# Altium PCB SlotMachin_V1.0.PcbDoc
Units mm, origin at the board's own origin, x right, y up, seen from the top; angles counter-clockwise.
Board outline 69.72 x 85.34 mm, 2 copper layers (Top Layer, Bottom Layer); 39 components, 46 nets, 163 pads, 11 vias.
Unrouted connection lines stored in the file: 11.
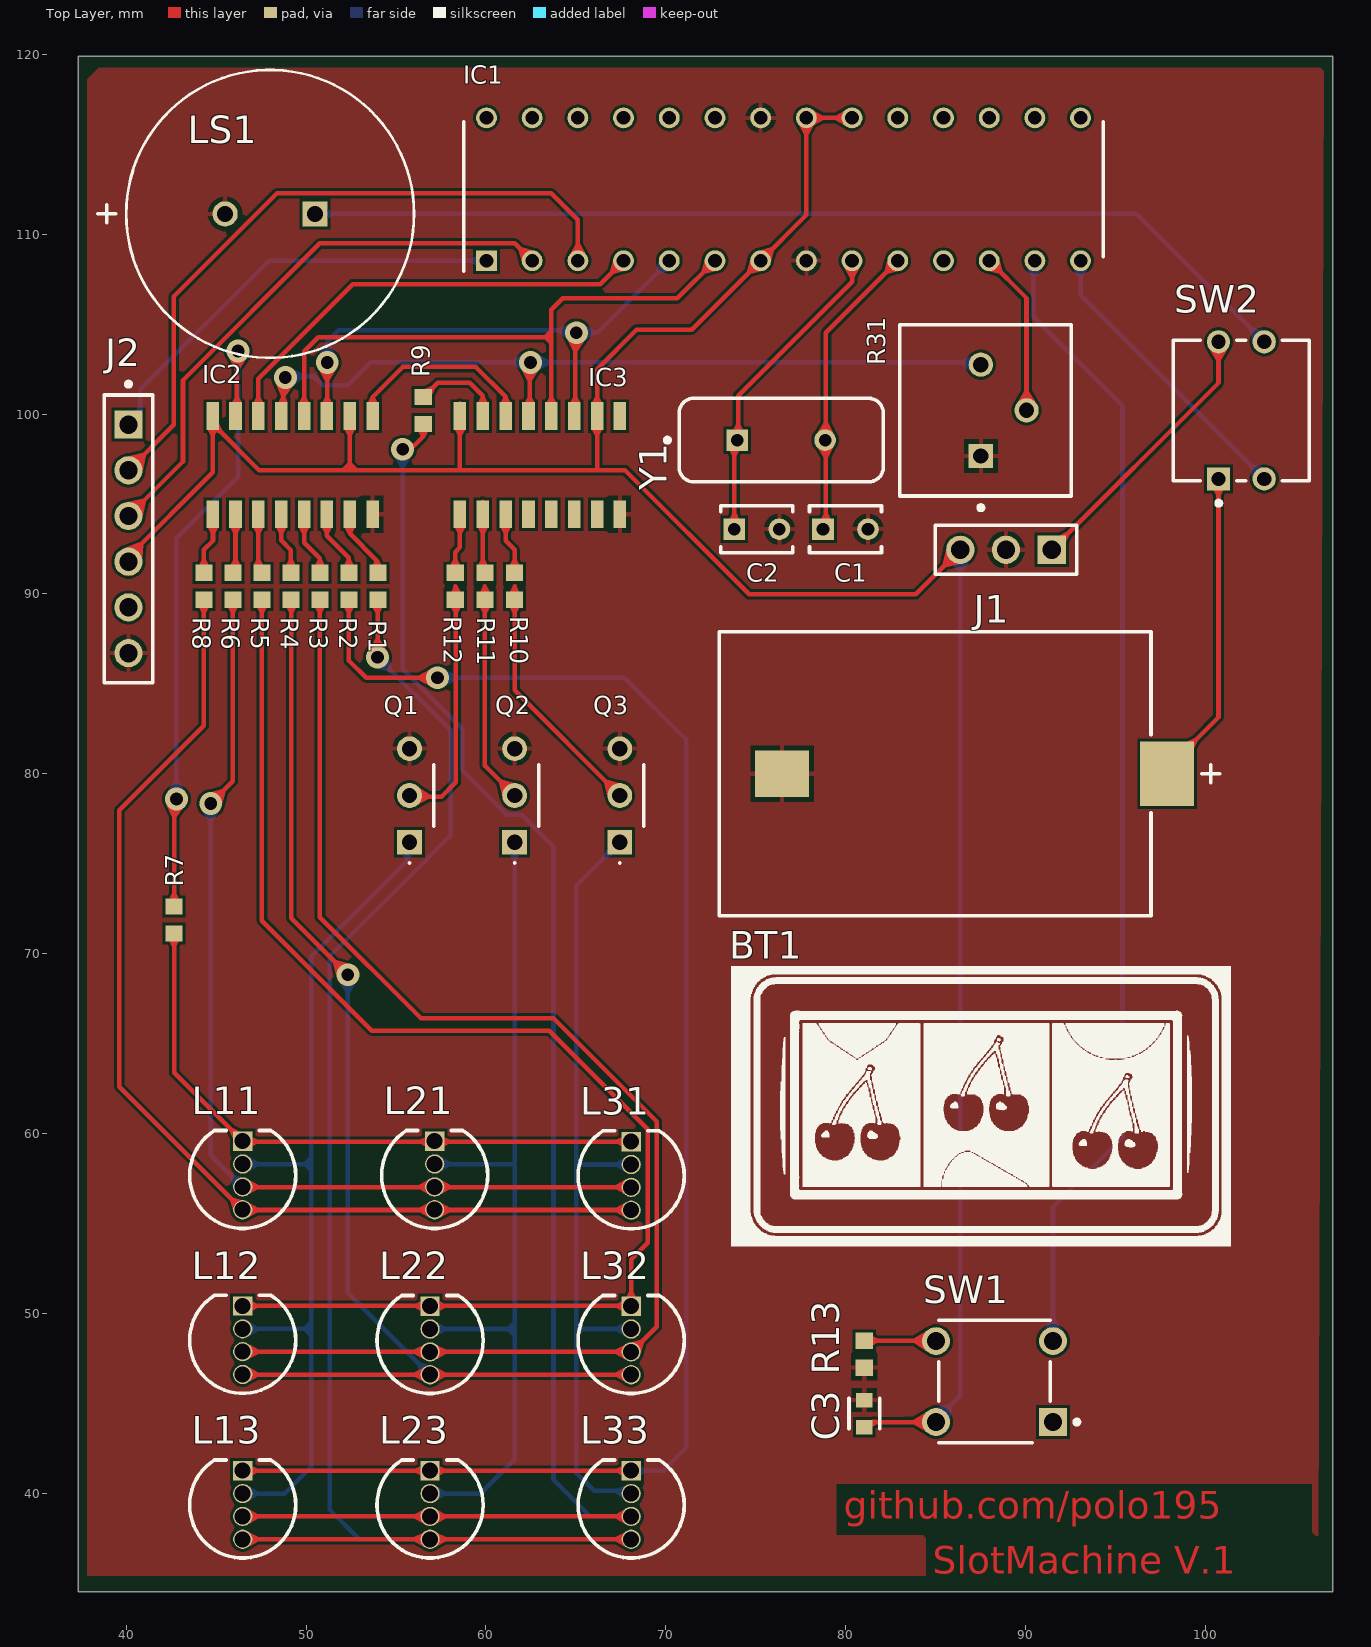
[diagram p0: Top Layer view]
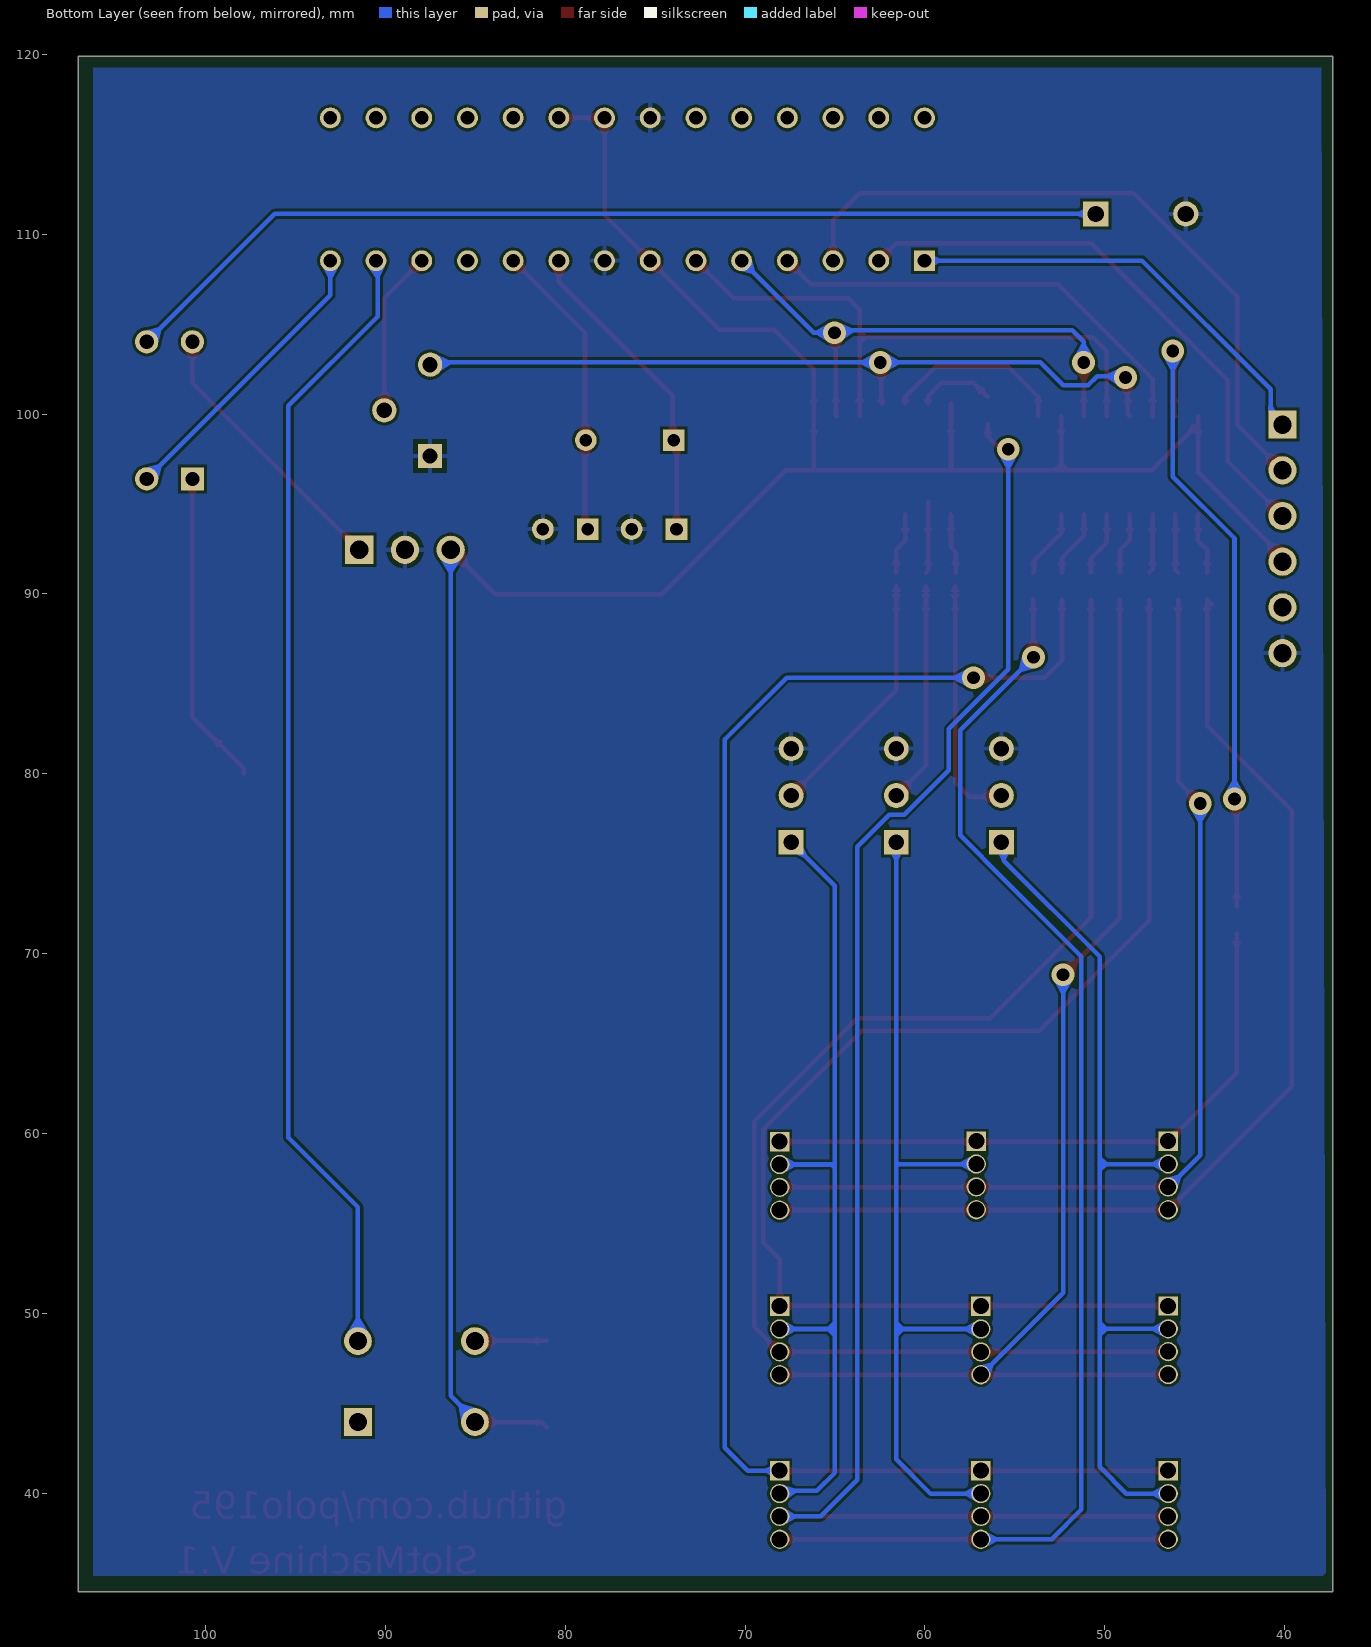
[diagram p1: Bottom Layer view, seen from below]
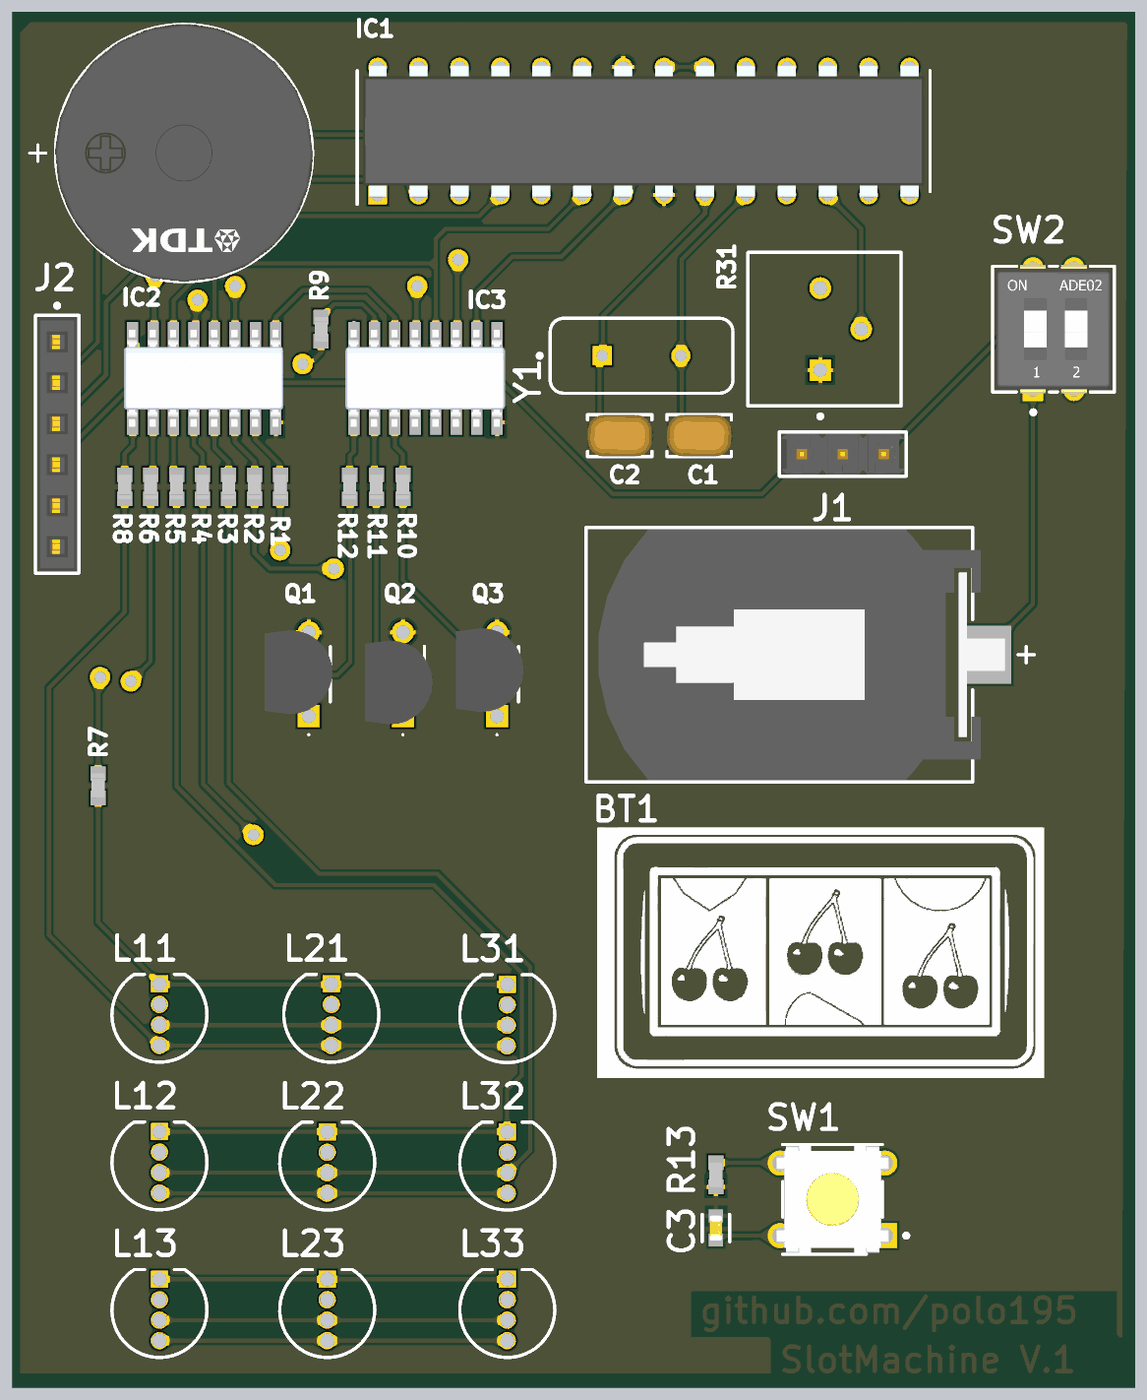
[diagram p2: 3D render of the assembled board from above, using the file's embedded part models]

## Layer stack, top to bottom
Top Solder: solder mask 0.0102, Solder Resist, Dk 3.5
Top Layer: signal copper 0.0356
Dielectric 1: dielectric 0.32, FR-4, Dk 4.8
Bottom Layer: signal copper 0.0356
Bottom Solder: solder mask 0.0102, Solder Resist, Dk 3.5

## Board outline
37.338,34.544 107.061,34.544 107.061,119.888 37.338,119.888

## Design rules (kind name [scope] priority, off if disabled: settings)
Clearance Clearance_1 [All] p1: gap=0.152 ignorepadtopadclearanceinfootprint=FALSE
PolygonConnect [All] p1: connectstyle=Relief reliefconductorwidth=0.254 reliefentries=4 polygonreliefangle="90 Angle" airgapwidth=0.254
RoutingVias [All] p1: holewidth=0.711 width=1.27 viastyle="Through Hole" minholewidth=0.711 minwidth=1.27 maxholewidth=0.711 maxwidth=1.27
SolderMaskExpansion [All] p1: expansion=0.102 istentingtop=FALSE
SupplyNets "Schematic Supply Nets_2" [InNet('VCC')] p1: voltage=0.000
SupplyNets "Schematic Supply Nets_1" [InNet('GND')] p2: voltage=0.000
SupplyNets "Schematic Supply Nets" [InNet('+5')] p3: voltage=0.000
Width [All] p1: maxlimit=0.254 minlimit=0.254 preferedwidth=0.254
30 further rules are at their usual default settings.

## Components (designator, comment, footprint, x,y, rotation, side; value= is the part's Value field where it differs from the comment)
BT1 "S8421-45R" FP-S8421-45R-MFG 84.963,80.01 r90 top
C1 "22pF" FP-K221K15X7RF5TL2-MFG 79.984,93.599 r0 top
C2 "22pF" FP-K221K15X7RF5TL2-MFG 75.057,93.599 r0 top
C3 "CC0603MRX7R7BB224" FP-CC0603-DA-MFG 81.026,44.45 r90 top value="220 nF"
IC1 "ATMEGA_328PU" DIP794W56P254L3486H508Q28N 76.537,112.49 r90 top
IC2 "74HCT595D,118" SOIC127P600X175-16N 49.257,97.155 r90 top
IC3 "74HCT595D,118" SOIC127P600X175-16N 63,97.155 r90 top
J1 "22-28-4035" FP-22-28-4035-MFG 88.9,92.456 r180 top
J2 "2212S-06SG-85" FP-2212S-06SG-85-MFG 40.132,93.064 r270 top
L11 "WP154A4SUREQBFZGC" KING-WP154A4SUREQBFZGC_V 46.482,57.683 r0 top
L12 "WP154A4SUREQBFZGC" KING-WP154A4SUREQBFZGC_V 46.482,48.527 r0 top
L13 "WP154A4SUREQBFZGC" KING-WP154A4SUREQBFZGC_V 46.482,39.37 r0 top
L21 "WP154A4SUREQBFZGC" KING-WP154A4SUREQBFZGC_V 57.15,57.683 r0 top
L22 "WP154A4SUREQBFZGC" KING-WP154A4SUREQBFZGC_V 56.896,48.514 r0 top
L23 "WP154A4SUREQBFZGC" KING-WP154A4SUREQBFZGC_V 56.896,39.37 r0 top
L31 "WP154A4SUREQBFZGC" KING-WP154A4SUREQBFZGC_V 68.072,57.658 r0 top
L32 "WP154A4SUREQBFZGC" KING-WP154A4SUREQBFZGC_V 68.072,48.514 r0 top
L33 "WP154A4SUREQBFZGC" KING-WP154A4SUREQBFZGC_V 68.072,39.37 r0 top
LS1 "SD1614T5-A1" FP-SD1614T5-A1-MFG 48.006,111.125 r180 top
Q1 "BC547BZL1G" BC547BZL1G 55.753,76.2 r90 top
Q2 "BC547BZL1G" BC547BZL1G 61.595,76.2 r90 top
Q3 "BC547BZL1G" BC547BZL1G 67.437,76.2 r90 top
R1 "560" RESC1608X55N 53.996,90.424 r270 top
R2 "560" RESC1608X55N 52.384,90.424 r270 top
R3 "560" RESC1608X55N 50.772,90.424 r270 top
R4 "560" RESC1608X55N 49.159,90.424 r270 top
R5 "560" RESC1608X55N 47.547,90.424 r270 top
R6 "560" RESC1608X55N 45.935,90.424 r270 top
R7 "560" RESC1608X55N 42.672,71.882 r90 top
R8 "560" RESC1608X55N 44.323,90.424 r270 top
R9 "560" RESC1608X55N 56.515,100.203 r90 top
R10 "1k" RESC1608X55N 61.595,90.424 r270 top
R11 "1k" RESC1608X55N 59.944,90.424 r270 top
R12 "1k" RESC1608X55N 58.293,90.424 r270 top
R13 "1k" RESC1608X55N 81.026,47.752 r270 top
R31 "M63P103KB30T607" VISH-M63P103KB30T607 87.763,100.203 r90 top
SW1 "B3W-1022" FP-B3W-1022-MFG 88.265,46.228 r0 top
SW2 "1825057-1" FP-1825057-1-MFG 101.981,100.203 r0 top
Y1 "FOXSLF/160-20" FOX-FOXSLF160-20 76.409,98.552 r0 top

## Footprints (in the part's own frame and the unit in brackets; to place one, negate y for a bottom-side part, rotate by r counter-clockwise, add the part's x,y. Pads: shape width x height; smd on the part's side, far side on the other; paste and mask are expansions set on the pad)
BC547BZL1G [mm]
  rect 1.381x1.381 hole 0.85: 1(0,0)
  round 1.381 hole 0.85: 2(2.6,0) 3(5.2,0)
  silkscreen extent -1.2,-1.34 4.32,0.05, body extent 0.13,-1.46 5.33,2.73, height 8.33
DIP794W56P254L3486H508Q28N [mm]
  rect 1.159x1.159 hole 0.759: 1(-3.969,16.51)
  round 1.159 hole 0.759: 2(-3.969,13.97) 3(-3.969,11.43) 4(-3.969,8.89) 5(-3.969,6.35) 6(-3.969,3.81) 7(-3.969,1.27) 8(-3.969,-1.27) 9(-3.969,-3.81) 10(-3.969,-6.35) 11(-3.969,-8.89) 12(-3.969,-11.43) 13(-3.969,-13.97) 14(-3.969,-16.51) 15(3.969,-16.51) 16(3.969,-13.97) 17(3.969,-11.43) 18(3.969,-8.89) 19(3.969,-6.35) 20(3.969,-3.81) 21(3.969,-1.27) 22(3.969,1.27) 23(3.969,3.81) 24(3.969,6.35) 25(3.969,8.89) 26(3.969,11.43) 27(3.969,13.97) 28(3.969,16.51)
  silkscreen extent -4.55,-17.78 3.75,17.78, body extent -4.11,-17.43 4.11,17.43, height 5.08
FOX-FOXSLF160-20 [mm] "THD, 2-Leads, Body 11.35x4.65mm"
  rect 1.2x1.2 hole 0.7: 1(-2.44,0)
  round 1.2 hole 0.7: 2(2.44,0)
  silkscreen extent -6.45,-2.32 5.68,2.32, body extent -5.67,-2.32 5.68,2.33, height 3.6
FP-22-28-4035-MFG [mm]
  rect 1.57x1.57 hole 1.02 paste-2539.97 mask+0: 1(-2.54,0)
  round 1.57 hole 1.02 paste-2539.97 mask+0: 2(0,0) 3(2.54,0)
  silkscreen extent -3.94,-1.37 3.94,1.37, body extent -4.04,-1.47 4.04,1.47, height 0.25
FP-2212S-06SG-85-MFG [mm]
  rect 1.57x1.57 hole 1.02 paste-2539.97 mask+0: 1(-6.35,0)
  round 1.57 hole 1.02 paste-2539.97 mask+0: 2(-3.81,0) 3(-1.27,0) 4(1.27,0) 5(3.81,0) 6(6.35,0)
  silkscreen extent -8.72,-1.35 8,1.35, body extent -8.1,-1.45 8.1,1.45, height 0.25
FP-1825057-1-MFG [mm]
  rect 1.29x1.29 hole 0.79 paste-2539.97 mask+0: 1(-1.27,-3.81)
  round 1.29 hole 0.79 paste-2539.97 mask+0: 2(1.27,-3.81) 3(1.27,3.81) 4(-1.27,3.81)
  silkscreen extent -3.78,-5.28 3.78,3.9, body extent -3.88,-4.55 3.88,4.55, height 0.25
FP-B3W-1022-MFG [mm]
  rect 1.55x1.55 hole 1 paste-2539.97 mask+0: 1(3.25,-2.25)
  round 1.55 hole 1 paste-2539.97 mask+0: 2(-3.25,-2.25) 3(3.25,2.25) 4(-3.25,2.25)
  silkscreen extent -3.1,-3.4 4.7,3.4, body extent -4.13,-3.5 4.13,3.5, height 0.25
FP-CC0603-DA-MFG [mm]
  rect 0.8x0.9 smd paste+0 mask+0: 1(-0.75,0) 2(0.75,0)
  silkscreen extent -0.85,-0.85 0.85,0.85, body extent -1.35,-0.75 1.35,0.75, height 0.25
FP-K221K15X7RF5TL2-MFG [mm]
  rect 1.2x1.2 hole 0.7 paste-2539.97 mask+0: 1(-1.25,0)
  round 1.2 hole 0.7 paste-2539.97 mask+0: 2(1.25,0)
  silkscreen extent -2,-1.3 2,1.3, body extent -2.1,-1.4 2.1,1.4, height 0.25
FP-S8421-45R-MFG [mm]
  rect 2.6x3 smd paste+0 mask+0: 1(0,8.5)
  rect 3.6x3 smd paste+0 mask+0: 2(0,-12.9)
  silkscreen extent -7.9,-15.83 7.9,12, body extent -8,-14.5 8,12.09, height 0.25
FP-SD1614T5-A1-MFG [mm]
  rect 1.4x1.4 hole 0.9 paste-2539.97 mask+0: 1(-2.5,0)
  round 1.4 hole 0.9 paste-2539.97 mask+0: 2(2.5,0)
  silkscreen extent -8,-8 9.57,8, body extent -8.1,-8.1 8.1,8.1, height 0.25
KING-WP154A4SUREQBFZGC_V [mm] "THD, 4-Leads, Dia 5.9mm, Pitch 1.27mm"
  rect 1.07x1.07 hole 0.889 paste-2539.97: 1(0,1.905)
  round 1.07 hole 0.889 paste-2539.97: 2(0,0.635) 3(0,-0.635) 4(0,-1.905)
  silkscreen extent -2.95,-2.95 2.95,2.5
RESC1608X55N [mm]
  rect 0.9x0.95 smd: 1(-0.75,0) 2(0.75,0)
  body extent -0.77,-0.4 0.77,0.4, height 0.46
SOIC127P600X175-16N [mm]
  rect 1.55x0.7 smd: 1(-2.725,4.445) 2(-2.725,3.175) 3(-2.725,1.905) 4(-2.725,0.635) 5(-2.725,-0.635) 6(-2.725,-1.905) 7(-2.725,-3.175) 8(-2.725,-4.445) 9(2.725,-4.445) 10(2.725,-3.175) 11(2.725,-1.905) 12(2.725,-0.635) 13(2.725,0.635) 14(2.725,1.905) 15(2.725,3.175) 16(2.725,4.445)
  body extent -3,-4.93 3,4.97, height 1.56
VISH-M63P103KB30T607 [mm] "THD, 3-Leads, Body 9.52x9.52mm, Pitch 2.54mm"
  rect 1.35x1.35 hole 0.85: 1(-2.54,0.26)
  round 1.35 hole 0.85: 2(0,-2.28) 3(2.54,0.26)
  silkscreen extent -5.53,-4.76 4.76,4.76, body extent -4.76,-4.76 4.76,4.76, height 10.91

## Part data
BT1: library part CMP-2000-07028-3, "BATTERY HOLDER COIN 20MM SMD", Case/Package=SMD/SMT, Max Operating Temperature=105°C, Min Operating Temperature=-40°C, Package Quantity=500, Contact Plating=Bronze, Material=Polyphenylene, Mount="Surface Mount", Number of Batteries=1, Number of Cells=1, Packaging="Tape and Reel", REACH SVHC="No SVHC", Termination=SMD/SMT
C1 C2: library part CMP-00030-39474895-1, "K221K15X7RF5TL2 Multilayer Ceramic Capacitor, 220 pF, 50 V, ± 10%, X7R, Radial Leaded", Capacitance=220pF, Case/Package=Dipped, Dielectric=X7R, Dielectric Material=Ceramic, Max Operating Temperature=125°C, Min Operating Temperature=-55°C, Tolerance=10%, Voltage Rating=50V, Depth=2.6mm, Diameter=500µm, Height=4mm, Height - Seated (Max)=5.588mm, Lead Diameter=500µm, Lead Length=30mm, Lead Pitch=2.5mm, Lead/Base Style=Straight, Length=4mm, Mount="Through Hole", NexarPartId=39474895, Number of Pins=2, Packaging="Cut Tape", Radiation Hardening=No, REACH SVHC=Unknown, RoHS=Compliant, Termination=Radial, Thickness=2.6mm, Voltage Rating (DC)=50V, Weight=160.004709mg, Width=2.4892mm
C3: library part CMP-03422-001274-1, "CAP CER 0.22UF 16V X7R 0603", Capacitance="220 nF", Manufacturer=YAGEO, Package=CC0603-DA, Temperature="-55°C to +125°C", Temperature Characteristic=X7R, Temperature Coefficient=15%, Temperature Range High=+125°C, Temperature Range Low=-55°C, Tolerance=0.2, Voltage="16 V", Automotive=No, Category=Cap, ComponentLink2Description=Datasheet, ComponentLink2URL=http://www.yageo.com/documents/recent/UPY-GPHC_X7R_6.3V-to-50V_18.pdf, Device Class L1="Passive Components", Device Class L2=Capacitors, Device Class L3="Ceramic Capacitors", Digikey Description="CAP CER 0.22UF 16V X7R 0603", Footprint Url=http://www.yageo.com/exep/pages/download/literatures/UPY-C_GEN_24.pdf, Height=0.9mm, Lead Free=Yes, Manufacturer Part Number=CC0603MRX7R7BB224, Material=Ceramic, Mouser Description="Multilayer Ceramic Capacitors MLCC - SMD/SMT 220nF 16V X7R 20%", Octopart=https://octopart.com/cc0603mrx7r7bb224-yageo-38999050, RoHS=TRUE, Voltage Rating="16 V"
IC1: "Integrated Circuit", Manufacturer_Name=Microchip, Manufacturer_Part_Number="ATMEGA 328PU", Datasheet Link=https://ww1.microchip.com/downloads/en/DeviceDoc/ATmega48A-PA-88A-PA-168A-PA-328-P-DS-DS40002061B.pdf, Height=5.08mm
IC2 IC3: "Integrated Circuit", Manufacturer_Name=Nexperia, Mouser Part Number=771-74HCT595D-T, Arrow Part Number=74HCT595D,118, Arrow Price/Stock=https://www.arrow.com/en/products/74hct595d118/nexperia?region=europe, Datasheet Link=https://assets.nexperia.com/documents/data-sheet/74HC_HCT595.pdf, Height=1.75mm, Manufacturer_Part_Number=74HCT595D,118, Mouser Price/Stock=https://www.mouser.co.uk/ProductDetail/Nexperia/74HCT595D118?qs=me8TqzrmIYVM2xcL0YiJEg%3D%3D
J1: library part CMP-00257-00247547-1, "22-28-4035 BOARD-BOARD Connector HEADER, 3WAY, 1ROW; Series: KK; Pitch Spacing: 2.54mm; No. of Rows: 1;", Color=Black, Contact Resistance=20mΩ, Current Rating=4A, Manufacturer Lifecycle Status=ACTIVE, Max Operating Temperature=75°C, Max Voltage Rating (DC)=250.25kV, Min Operating Temperature=0°C, Voltage Rating=250V, Connector Type="Male Pin", Contact Material=Brass, Contact Mating Length=7.493mm, Contact Plating=Gold, Country of Origin=US, Gender=Male, Glow Wire Compliant=Non-compliant, Housing Color=Black, Housing Material=Thermoplastic, Lead Free="Lead Free", Lifecycle Status=Production, Mount="Through Hole", NexarPartId=247547, Number of Circuits=3, Number of Contacts=3, Number of Positions=3, Number of Rows=1, Orientation=Vertical, Packaging=Bulk, Pitch=2.54mm, Plating=Tin, REACH SVHC=Unknown, RoHS=Compliant, Schedule B=8536694040, Termination="Through Hole"
J2: library part CMP-12414-000007-1, "Header, Rectangular, 6 Positions, Receptacle, 2.54mm pitch, Vertical, Through-Hole", Flammability Rating="UL94 V-0", Insulation Resistance=1GR, Contact Material=Bronze, Contact Plating=Gold, Gender=Receptacle, Height=0.35inch, Length=0.63inch, Mount="Through Hole", Number of Contacts=6, Number of Rows=1, REACH SVHC="No SVHC", RoHS Compliant=Yes, Termination="Through Hole", Weight=0.11lb, Width=0.12inch
L11 L12 L13 L21 L22 L23 L31 L32 L33: library part CMP-2000-07415-1, "Full Color LED Lamp, Dominant Wavelength RGB 630 / 525 / 465 nm, -40 to 85 degC, 4-Pin THD, RoHS", Color=Red,Green,Blue(RGB), Current - Test=20mA, Manufacturer=Kingbright, Millicandela Rating=1300mcdRed,1700mcdGreen,900mcdBlue, Package / Case=Radial-4Leads, Package Description="4-Pin Through Hole LED, Dia 5.9 mm, Pitch 1.27 mm", Standard Package=500, Voltage - Forward (Vf) (Typ)=1.9VRed,3.3VGreen,3.3VBlue, 3D Model="WP154A4SUREQBFZGW.sldprt /  / WP154A4SUREQBFZGW.pro /  / WP154A4SUREQBFZGW.igs /  / WP154A4SUREQBFZGW.stp", Category=Optoelectronics, Datasheet URL=https://www.kingbrightusa.com/images/catalog/spec/WP154A4SUREQBFZGC.pdf, Datasheet Version="Rev. 5A, 08/2014", Family=LEDIndication-Discrete, Height=8.60mm, Lens Style/Size=RoundwithDomedTop,5mm,T-13/4, Lens Type=Clear, Manufacturer URL=http://www.kingbright.com/, Mounting Technology=ThroughHole, Mounting Type=ThroughHole, Online Catalog=5mm,T-13/4(RGB)RoundwithDomedTopLEDLamp, Other Names="754-1615 / WP154A4SUREQBFZGC-ND", Package Reference=WP154A4SUREQBFZGC, Packaging=Bulk, Viewing Angle=50°, Wavelength - Dominant=630nm,525nm,465nm, Wavelength - Peak=645nm,515nm,460nm
LS1: library part CMP-08413-000005-1, "BUZZER MAGNETIC 5V 80DB 2048HZ 1", Frequency=2.048kHz, Max Operating Temperature=85°C, Min Operating Temperature=-40°C, Operating Supply Current=80mA, Voltage Rating=5V, Mount=Panel, Sensing Method=Magnetic, Termination="PC Pins"
Q1 Q2 Q3: "Transistor BJT NPN", Manufacturer_Name=onsemi, Mouser Part Number=863-BC547BZL1G, Arrow Part Number=BC547BZL1G, Arrow Price/Stock=https://www.arrow.com/en/products/bc547bzl1g/on-semiconductor?region=nac, Datasheet Link=https://www.onsemi.com/download/data-sheet/pdf/BC546-D.PDF, Height=9.33mm, Manufacturer_Part_Number=BC547BZL1G, Mouser Price/Stock=https://www.mouser.com/Search/Refine.aspx?Keyword=863-BC547BZL1G
R1 R2 R3 R4 R5 R6 R7 R8 R9 R10 R11 R12 R13: library part CPF0603B12RE, "Resistor", Manufacturer_Name="TE Connectivity", Datasheet Link=http://www.farnell.com/datasheets/1786775.pdf, Height=0.55mm, Manufacturer_Part_Number=CPF0603B12RE
R31: library part CMP-1666-00012-6, "Single-Turn Cermet Trimmer, 10 KOhm, -55 to 125 degC, 3-Pin THD, RoHS, Bulk", Manufacturer="Vishay Semiconductor", ComponentLink1Description="Manufacturer URL", ComponentLink1URL=http://www.vishay.com/, ComponentLink2Description=Datasheet, ComponentLink2URL=http://120.52.73.14/www.mouser.com/ds/2/427/63-239923.pdf, DatasheetVersion=09/2015, Mounting Technology="Through Hole", PackageDescription="3-Pin Through Hole Device, Body 9.52 x 9.52 mm, Pitch 2.54 mm", PackageReference=M63P103KB30T607
SW1: library part CMP-08834-000055-1, "SWITCH TACTILE SPST-NO 0.05A 24V", Max Operating Temperature=70°C, Min Operating Temperature=-25°C, Operating Force=230gf, Ratings=IP67, Actuator Type=Standard, Illumination Type=Non-Illuminated, Mechanical Life=1000000Cycles, Mount="Through Hole", Packaging=Bulk, RoHS Compliant=Yes, Switch Function=Off-Mom, Switch Travel=0.25mm, Termination="PC Pin", Throw Configuration=SPST
SW2: library part CMP-03400-000012-1, "SWITCH SLIDE DIP SPST 100MA 24V", Contact Current Rating=100mA, Contact Resistance=50mΩ, Manufacturer="TE Connectivity", Temperature="-30°C to +85°C", Temperature Range High=+85°C, Temperature Range Low=-30°C, Voltage Rating Dc=24V, Automotive=No, Category=Switch, ComponentLink2Description=Datasheet, ComponentLink2URL=https://www.te.com/commerce/DocumentDelivery/DDEController?Action=srchrtrv&DocNm=1825057&DocType=Customer+Drawing&DocLang=English, Device Class L1=Electromechanical, Device Class L2=Switches, Device Class L3="DIP Switches", Digikey Description="SWITCH SLIDE DIP SPST 100MA 24V", Electromechanical Life=1000Cycles, Height=6.15mm, Lead Free=Yes, Manufacturer Part Number=1825057-1, Mount="Through Hole", Number of Circuits=2, Octopart=https://octopart.com/1825057-1-te+connectivity-46507313, Package=1825057-1, RoHS=TRUE, Standoff Height=1.3mm, Throw Configuration=SPST
Y1: library part CMP-1749-00003-1, "Resistance Weld Thru-Hole Crystal, 16 MHz, -20 to 70 degC, 2-Pin THD, RoHS, Bulk", Case\Package=Axial, Max Operating Temperature="155 degC", Min Operating Temperature="-55 degC", Package Quantity=200, Power Rating="250 mW", Resistance="221 kohm", Tolerance=1%, Voltage Rating="250 V", ComponentLink1Description="Manufacturer URL", ComponentLink1URL=http://www.foxonline.com/, ComponentLink2Description=Datasheet, ComponentLink2URL=http://www.foxonline.com/pdfs/hc49slf.pdf, DatasheetVersion=Mar-15, Length="0.248 inch", Mount="Through Hole", PackageDescription="2-Pin Through Hole Device, Body 11.35 x 4.65 mm", PackageReference=FOXSLF160-20, Packaging=Bulk, RoHSCompliant=true

## Via types
v1: diameter 1.27, hole 0.711, Top Layer to Bottom Layer, 11 vias

## Nets (pads, with @x,y where several pads share a name; then routed paths per layer and width w, separated by ;. In a path a pad name is that pad's centre, name@x,y a point inside that pad or via, vN(x,y) a via of type N, cw(c..) or ccw(c..) an arc to the next point about the centre after c; other vN are vias at no path point)
+5: C3.1 IC1.7 IC1.20 IC1.21 IC2.10 IC2.16 IC3.10 IC3.16 J1.3 J2.4 SW1.2 | length 145
  Top Layer w0.254: J2.4 40.132,92.075 44.812,96.755 IC2.16@44.812,99.441 ; IC2.16 44.812,99.455 47.388,96.879 52.432,96.879 ; IC2.10 52.432,96.879 ; IC3.16@58.555,100.584 IC3.16 58.555,96.909 58.525,96.879 ; IC1.20 IC1.21 77.807,111.061 IC1.7 71.438,104.692 68.37,104.692 66.175,102.497 IC3.10 66.175,96.887 66.167,96.879 ; C3.1 81.299,43.973 83.271,43.973 83.276,43.978 SW1.2 ; J1.3 83.887,89.983 74.626,89.983 67.729,96.879 66.167,96.879 ; 52.432,96.879 58.525,96.879 ; 58.525,96.879 66.167,96.879
  Bottom Layer w0.254: SW1.2@85.015,44.105 86.36,45.45 J1.3
GND: BT1.1 C1.2 C2.2 C3.2 IC1.8 IC1.22 IC2.8 IC3.8 J1.2 J2.6 LS1.2 Q1.3 Q2.3 Q3.3 R13.2 R31.1
NetC1_1: C1.1 IC1.10 Y1.2 | length 16.7
  Top Layer w0.254: C1.1 78.894,93.759 78.894,98.507 Y1.2 78.894,98.597 78.894,104.528 IC1.10
NetC2_1: C2.1 IC1.9 Y1.1 | length 17.6
  Top Layer w0.254: C2.1 73.807,98.39 74.014,98.597 74.014,101.021 80.347,107.354 IC1.9
NetIC1_1: IC1.1 J2.1 | length 24.4
  Bottom Layer w0.254: J2.1 40.79,100.072 40.79,101.369 47.942,108.521 IC1.1
NetIC1_2: IC1.2 J2.3 | length 31.8
  Top Layer w0.254: J2.3 43.162,97.364 43.162,101.876 50.768,109.482 61.607,109.482 IC1.2
NetIC1_3: IC1.3 J2.2 | length 38.4
  Top Layer w0.254: J2.2 42.654,99.396 42.654,106.535 48.387,112.268 63.627,112.268 65.107,110.788 IC1.3
NetIC1_4: IC1.4 IC2.14 | length 25.1
  Top Layer w0.254: IC2.14 47.352,101.962 52.606,107.216 66.343,107.216 IC1.4
NetIC1_5: IC1.5 IC2.11 IC3.11 | length 29.8
  Top Layer w0.254: IC2.11 51.171,99.89 51.171,102.86 v1(51.181,102.87) ; IC3.11 64.965,99.939 64.965,104.462 v1(65.024,104.521)
  Bottom Layer w0.254: v1(51.181,102.87) 51.181,104.013 51.816,104.648 64.897,104.648 v1(65.024,104.521) 66.187,104.521 IC1.5
NetIC1_6: IC1.6 IC2.12 IC3.12 | length 33.8
  Top Layer w0.254: IC2.12 49.892,103.486 50.681,104.275 63.635,104.275 ; IC3.12 63.635,104.275 ; IC1.6 70.632,106.426 64.262,106.426 63.635,105.799 63.635,104.275
NetIC1_12: IC1.12 R31.2 | length 9.2
  Top Layer w0.254: IC1.12 90.043,106.445 R31.2
NetIC1_13: IC1.13 SW1.3 | length 63.7
  Bottom Layer w0.254: IC1.13 90.424,108.438 90.424,105.41 95.377,100.457 95.377,59.791 91.515,55.929 SW1.3
NetIC1_14: IC1.14 SW2.2 | length 16.4
  Bottom Layer w0.254: IC1.14 93.047,106.597 SW2.2
NetIC2_1: IC2.1 R8.1 | length 3.5
  Top Layer w0.254: R8.1 44.323,92.456 44.831,92.964 44.831,94.411 IC2.1
NetIC2_2: IC2.2 R6.1 | length 3.3
  Top Layer w0.254: R6.1 46.082,91.321 IC2.2
NetIC2_3: IC2.3 R5.1 | length 3.3
  Top Layer w0.254: IC2.3 47.352,91.369 R5.1
NetIC2_4: IC2.4 R4.1 | length 3.5
  Top Layer w0.254: IC2.4 48.622,92.983 49.159,92.446 R4.1
NetIC2_5: IC2.5 R3.1 | length 3.6
  Top Layer w0.254: IC2.5 49.892,92.856 50.772,91.976 R3.1
NetIC2_6: IC2.6 R2.1 | length 3.8
  Top Layer w0.254: IC2.6 51.162,93.237 52.384,92.015 R2.1
NetIC2_7: IC2.7 R1.1 | length 3.9
  Top Layer w0.254: IC2.7 52.432,93.364 53.94,91.856 53.94,91.23 R1.1
NetIC2_9: IC2.9 IC3.14 | length 10.2
  Top Layer w0.254: IC2.9 53.702,100.946 55.372,102.616 59.436,102.616 61.095,100.957 IC3.14@61.095,100.584
NetIC2_13: IC2.13 IC3.13 R31.3 | length 44.1
  Top Layer w0.254: IC2.13 48.737,99.995 48.737,101.91 v1(48.851,102.025) ; IC3.13@62.365,100.584 62.425,100.643 62.425,102.811 v1(62.484,102.87)
  Bottom Layer w0.254: v1(48.851,102.025) 48.935,102.108 50.429,102.108 50.937,101.6 52.324,101.6 53.594,102.87 v1(62.484,102.87) 87.376,102.87 R31.3
NetIC2_15: IC2.15 R7.2 | length 36
  Top Layer w0.254: R7.2 42.672,78.486 v1(42.799,78.613) ; IC2.15 46.155,99.953 46.155,103.432 v1(46.228,103.505)
  Bottom Layer w0.254: v1(42.799,78.613) 42.799,93.091 46.228,96.52 v1(46.228,103.505)
NetIC3_1: IC3.1 R12.1 | length 3.4
  Top Layer w0.254: R12.1 58.293,92.329 58.555,92.591 IC3.1
NetIC3_2: IC3.2 R11.1 | length 4
  Top Layer w0.254: IC3.2@59.825,95.134 59.825,91.293 R11.1
NetIC3_3: IC3.3 R10.1 | length 3.5
  Top Layer w0.254: IC3.3 61.095,92.956 61.595,92.456 R10.1
NetIC3_15: IC3.15 R9.2 | length 4.4
  Top Layer w0.254: R9.2 56.54,100.953 57.327,101.74 59.094,101.74 59.825,101.009 IC3.15@59.825,100.584
NetJ1_1: J1.1 SW2.4 | length 15.4
  Top Layer w0.254: J1.1 100.711,101.727 SW2.4
NetL11_1: L11.1 L21.1 L31.1 R7.1 | length 34.7
  Top Layer w0.254: R7.1 42.672,63.398 L11.1 46.507,59.563 L31.1
NetL11_2: L11.2 L12.2 L13.2 Q1.1 | length 49
  Bottom Layer w0.254: L13.2 48.807,40.005 50.292,41.49 50.292,49.162 ; L12.2 50.292,49.162 ; L11.2 50.292,58.318 ; Q1.1 55.626,76.073 55.626,75.184 50.292,69.85 50.292,58.318 ; 50.292,49.162 50.292,58.318
NetL11_3: L11.3 L21.3 L31.3 R6.2 | length 55.5
  Top Layer w0.254: v1(44.704,78.359) 45.935,79.59 R6.2 ; L11.3 46.495,57.036 68.059,57.036 L31.3
  Bottom Layer w0.254: v1(44.704,78.359) 44.704,58.801 46.457,57.048 L11.3
NetL11_4: L11.4 L21.4 L31.4 R8.2 | length 60.7
  Top Layer w0.254: R8.2@44.069,89.42 R8.2 44.323,82.677 39.624,77.978 39.624,62.611 46.457,55.778 L11.4 46.495,55.766 68.059,55.766 L31.4
NetL12_1: L12.1 L22.1 L32.1 R5.2 | length 75.9
  Top Layer w0.254: L12.1 68.059,50.432 L32.1 68.072,53.022 68.988,53.938 68.988,60.256 63.517,65.727 53.653,65.727 47.547,71.833 R5.2
NetL12_3: L12.3 L22.3 L32.3 R3.2 | length 76.1
  Top Layer w0.254: L12.3 46.488,47.885 68.066,47.885 L32.3 68.097,47.879 69.496,49.278 69.496,60.679 63.754,66.421 56.388,66.421 50.772,72.037 R3.2
NetL12_4: L12.4 L22.4 L32.4 R4.2 | length 67.9
  Top Layer w0.254: L12.4 46.488,46.615 68.066,46.615 L32.4 ; R4.2@49.184,89.674 49.184,71.974 v1(52.324,68.834)
  Bottom Layer w0.254: v1(52.324,68.834) 52.324,51.156 56.871,46.609 L22.4
NetL13_1: L13.1 L23.1 L33.1 R2.2 | length 88.5
  Top Layer w0.254: L13.1 L23.1 L33.1 ; R2.2 52.384,86.3 53.34,85.344 v1(57.31,85.344)
  Bottom Layer w0.254: v1(57.31,85.344) 67.691,85.344 71.12,81.915 71.12,42.545 69.85,41.275 L33.1
NetL13_3: L13.3 L23.3 L33.3 R9.1 | length 90.1
  Top Layer w0.254: L13.3 L23.3 L33.3 ; v1(55.372,98.044) 55.566,98.238 56,98.238 56.515,98.753 R9.1
  Bottom Layer w0.254: v1(55.372,98.044) 55.372,85.808 58.674,82.506 58.674,80.206 61.151,77.728 61.986,77.728 63.754,75.961 63.754,40.767 65.786,38.735 L33.3
NetL13_4: L13.4 L23.4 L33.4 R1.2 | length 82.9
  Top Layer w0.254: L13.4 L23.4 L33.4 ; v1(53.975,86.487) 53.975,89.653 R1.2
  Bottom Layer w0.254: v1(53.975,86.487) 58.039,82.423 58.039,76.581 56.825,75.367 56.825,75.352 56.601,75.128 56.586,75.128 51.308,69.85 51.308,39.116 52.959,37.465 L23.4
NetL21_2: L21.2 L22.2 L23.2 Q2.1 | length 49
  Bottom Layer w0.254: L23.2 59.69,40.005 61.595,41.91 61.595,49.149 ; L22.2 61.595,49.149 ; L21.2 61.493,58.318 61.595,58.42 ; Q2.1 61.595,58.42 ; 61.595,49.149 61.595,58.318 61.595,58.42
NetL31_2: L31.2 L32.2 L33.2 Q3.1 | length 45.7
  Bottom Layer w0.254: Q3.1 65.022,73.785 65.022,58.122 ; L33.2 67.916,40.161 66.011,40.161 65.022,41.15 65.022,49.149 ; L32.2 65.022,49.149 ; L31.2 65.193,58.293 65.022,58.122 ; 65.022,49.149 65.022,58.122
NetLS1_1: LS1.1 SW2.3 | length 55.7
  Bottom Layer w0.254: LS1.1 96.139,111.125 SW2.3
NetQ1_2: Q1.2 R12.2 | length 13.8
  Top Layer w0.254: Q1.2 55.813,78.74 57.531,78.74 58.326,79.535 58.326,90.403 58.293,90.436
NetQ2_2: Q2.2 R11.2 | length 12.3
  Top Layer w0.254: 59.944,90.436 59.944,80.451 Q2.2
NetQ3_2: Q3.2 R10.2 | length 14.1
  Top Layer w0.254: 61.595,90.436 61.595,84.642 Q3.2
NetR13_1: R13.1 SW1.4 | length 4
  Top Layer w0.254: R13.1 84.991,48.502 SW1.4
VCC: BT1.2 SW2.1 | length 17.6
  Top Layer w0.254: BT1.2 97.863,80.31 100.711,83.158 SW2.1
pads on no net: IC1.11 IC1.15 IC1.16 IC1.17 IC1.18 IC1.19 IC1.23 IC1.24 IC1.25 IC1.26 IC1.27 IC1.28 IC3.4 IC3.5 IC3.6 IC3.7 IC3.9 J2.5 SW1.1

## Polygon pours and split planes (outlines as drawn)
GND on Bottom Layer "GND_L02_P000" (solid, pour order 0): 37.971,119.253 106.236,119.253 106.236,35.433 37.721,35.433
GND on Top Layer "GND_L01_P001" (solid, remove dead copper, pour order 1): 106.553,119.253 38.481,119.253 37.846,118.618 37.846,35.433 106.236,35.433

## Other copper
Top Layer:
  text "github.com/polo195" at 79.883,38.608 h1.52
  text "SlotMachine V.1" at 84.836,35.56 h1.52

## Silkscreen, mask and mechanical layers (free items; w line width, h text height)
Top Overlay:
  drawing of 23 lines, arcs and shapes, not listed
Mechanical 1:
  lines w0.254: 37.339,34.597 107.061,34.597 107.061,119.888 37.339,119.888 37.339,34.597